# EAGLE board Squirco Power v1.0 (EAGLE 6.5.0)
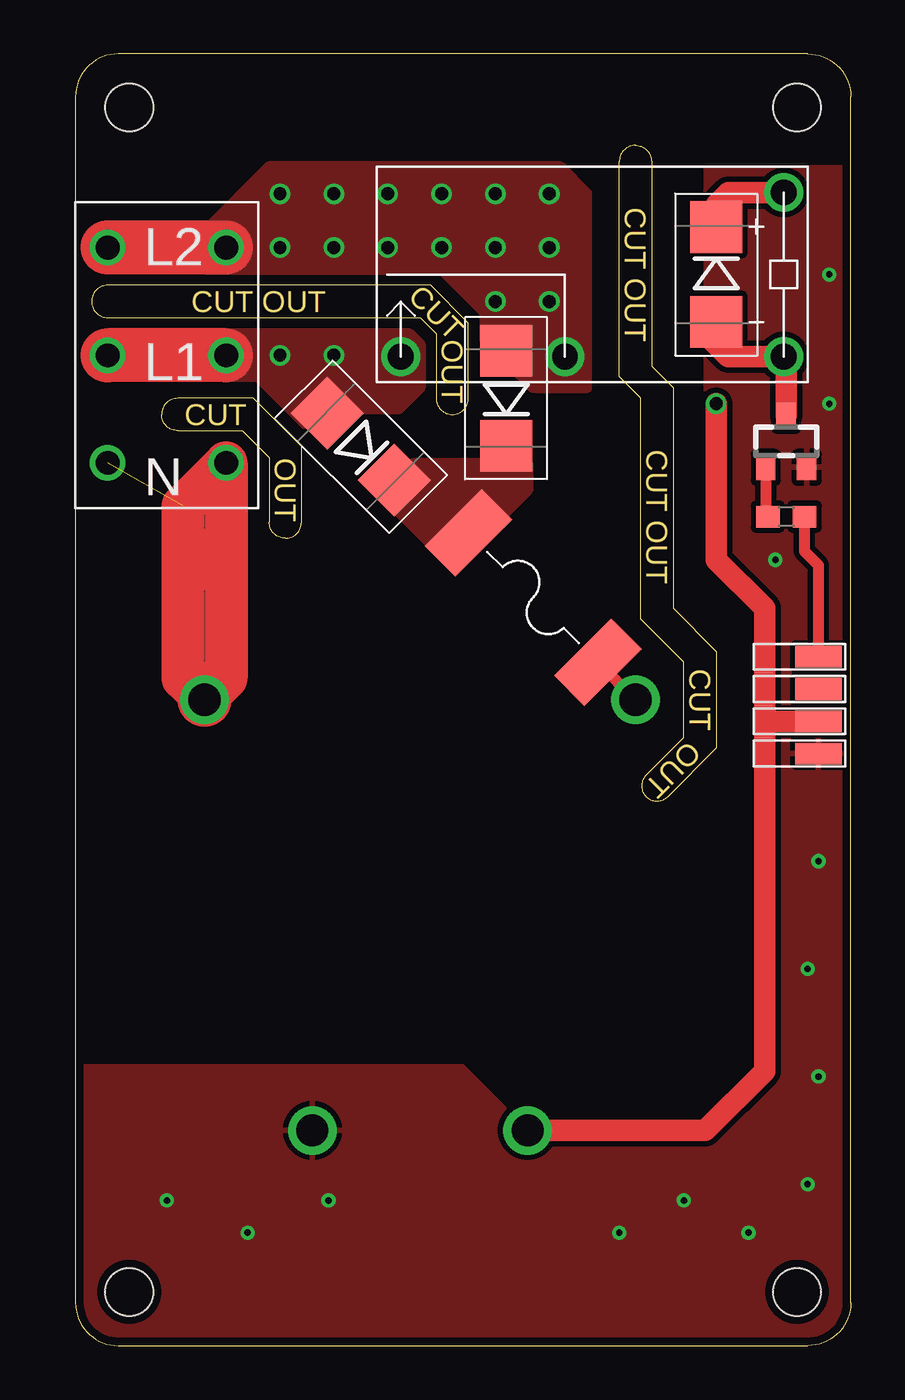
[diagram p0: board, top side]
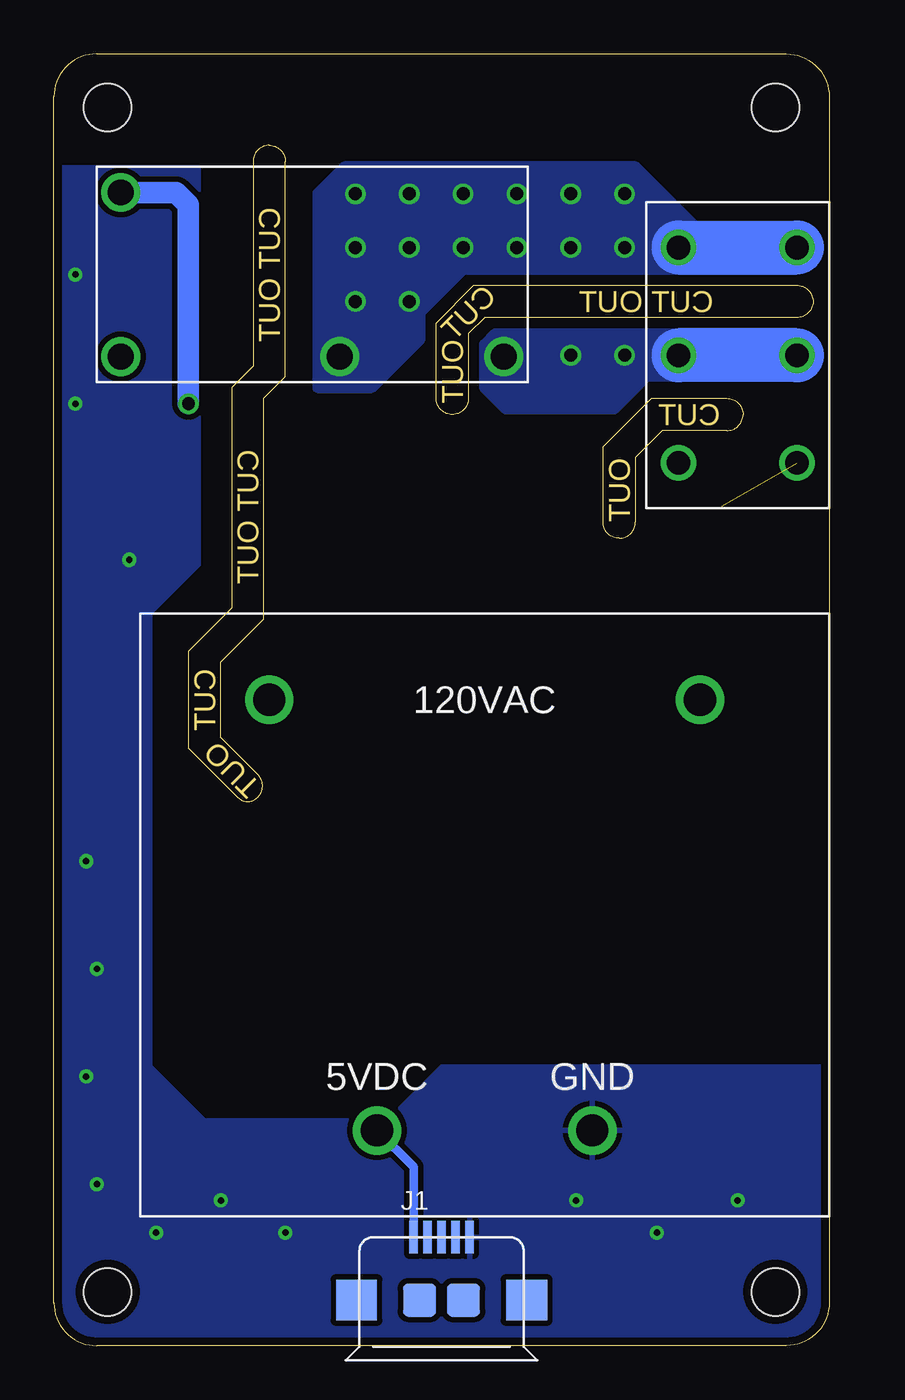
[diagram p1: board, bottom side, seen from below]

Size 36 x 60 mm. Coordinates in mm from the lower left corner, seen from the top.
Outline: 2,0 34,0 arc90 36,2 36,58 arc90 34,60 2,60 arc90 0,58 0,2 arc90 2,0
Outline: 26.75,55 26.75,45.5 27.75,44.5 27.75,34.25 29.75,32.25 29.75,27.75 27.47,25.47 arc-90 26.53,25.47 arc-90 26.53,26.53 28.25,28.25 28.25,31.75 26.25,33.75 26.25,44 25.25,45 25.25,55 arc-90 26,55.75 arc-90 26.75,55
Outline: 4.75,42.5 7.75,42.5 9,41.25 9,38.25 arc90 9.75,37.5 arc90 10.5,38.25 10.5,41.75 8.25,44 4.75,44 arc90 4,43.25 arc90 4.75,42.5
Outline: 16.5,49.25 1.5,49.25 arc90 0.75,48.5 arc90 1.5,47.75 16,47.75 16.75,47 16.75,44 arc90 17.5,43.25 arc90 18.25,44 18.25,47.5 16.5,49.25
Copper layers (1*16): Top 0.0356mm / dielectric 1.5011mm / Bottom 0.0356mm
Design rules "LaenPCBOrder *": minimum track width 6mil, minimum drill 13mil, track to track 6mil, track to pad 6mil, pad to pad 6mil, via to via 6mil, smd to smd 6mil, copper to edge 15mil, drill to drill 6mil, minimum pad ring 7mil, minimum via ring 7mil, stop-mask expansion 3mil, vias tented up to drill 15mil, thermal gap 10mil
Net classes: 1 Tline: width 0.003 mm, drill 0.33 mm; 2 120v Mains 5A: clearance 1.27 mm
Holes 2.2 mm at 2.5,57.5 33.5,57.5 2.5,2.5 33.5,2.5

## Footprints (pad centres in the part's own frame; a part is rotated, then mirrored left to right if it is on the bottom)
SMB-DIODE = smd 2.4 x 2.4: A 2.2,0; C -2.2,0
UMT250 = smd 2 x 3.75: P$1 -4.25,0; P$2 4.25,0
B-SMD-5P = smd 0.38 x 1.52: 1 -1.3,2.54; 2 -0.65,2.54; 3 0,2.54; 4 0.65,2.54; 5 1.3,2.54 | smd 1.524 x 1.524: E1 -1.016,-0.381; E2 1.016,-0.381 | smd 1.9 x 1.9: P1 -3.95,-0.381; P2 3.95,-0.381
LF-SMT5 = drill 1.1: 1 -5,-2.75; 2 -5,2.75; 3 0,-2.75; 4 0,2.75; 5 5,-2.75; 6 5,2.75
SOT23 = smd 0.9 x 1.2: 1 -0.95,-1.2; 2 0.95,-1.2; 3 0,1.2
0603-RES = smd 1.1 x 1: 1 -0.85,0; 2 0.85,0
VTX-214-003-1XX = drill 1.5: 1 10,10; 2 -10,10; 3 -5,-10; 4 5,-10
S04-4MM = smd 2.15 x 1: 1 0,0; 2 0,1.5; 3 0,3; 4 0,4.5
ALQ305 = drill 1.2: C1 -3.81,8.89; C2 3.81,8.89; COM 3.81,-1.27; NO 3.81,-8.89

## Placement (x,y rotation side)
D1  [SMB-DIODE]  29.75,49.75 270 top
D2  [SMB-DIODE]  13.25,41.75 135 top
D3  [SMB-DIODE]  20,44 90 top
F1  UMT250  [UMT250]  21.25,34.75 315 top
J1  MICRO-USB-5P-340015001  [B-SMD-5P]  18,2.5 0 bottom
JP2  LSF-SMT5  [LF-SMT5]  4.25,46 270 top
Q1  BSS138  [SOT23]  33,42 0 top
R11  39  [0603-RES]  33,38.5 180 top
U$1  VTX-214-003-105  [VTX-214-003-1XX]  16,20 0 bottom
U$3  S04-4MM  [S04-4MM]  34.5,32 180 top
U$4  ALQ305  [ALQ305]  24,49.75 270 top

## Library data of the parts
D1-D3 = SparkFun-DiscreteSemi; PROD_ID: DIO-09646
F1 JP2 = L1
J1 = Connector
Q1 = m-pad-2.1
R11 = SparkFun-Resistors
U$1 = SMPS
U$3 = pinhead-half
U$4 = relay

## Nets
5V: D1.C J1.1 U$1.3 U$3.3 U$4.C1
FCLD: U$3.2
GND: J1.5 Q1.2 U$1.4 U$3.4
L1 [120v Mains 5A]: D2.A JP2.3 JP2.4 U$4.NO
L2 [120v Mains 5A]: D3.A JP2.1 JP2.2 U$4.COM
N [120v Mains 5A]: JP2.5 JP2.6 U$1.1
N$1: F1.P$2 U$1.2
N$4: Q1.1 R11.2
N$14 [120v Mains 5A]: D2.C D3.C F1.P$1
N$15: D1.A Q1.3 U$4.C2
RLY: R11.1 U$3.1

## Tracks (layer width: path | path; a pad name or v marks a point on that pad's centre or on a via)
5V  (via drill 0.6)
  Top 1: U$4.C1 30.31,53.56 29.75,53 D1.C | U$1.3 29.25,10 32,12.75 32,29 | 32,29 32,34.25 29.75,36.5 v29.75,43.75 | U$3.3 32,29
  Bottom 0.4: J1.1 19.3,8.3 U$1.3
  Bottom 1: v29.75,43.75 29.75,53 30.31,53.56 U$4.C1
GND  (via drill 0.3)
  other vias: 35,43.75 32.5,36.5 34.5,22.5 34,17.5 34.5,12.5 34,7.5 35,49.75 28.25,6.75 25.25,5.25 11.75,6.75 8,5.25 4.25,6.75 31.25,5.25
  pour Top (isolate 0.254): 36.5,-3.25 36.25,54.75 29.25,54.75 29.25,36.25 31.5,34 31.5,13 29,10.5 20.5,10.5 18,13 -0.5,13 -0.5,-3.25
  pour Bottom (isolate 0.254): -1.25,13 -1.25,-4 37.25,-4 37.25,54.75 29.25,54.75 29.25,36.25 31.5,34 31.5,13 29,10.5 20.5,10.5 18,13
L1  (via drill 0.6)
  Top 2.5: JP2.4 JP2.3
  Bottom 2.5: JP2.3 JP2.4
  other vias: 9.5,46 12,46
  pour Top (no thermals): 7,47 15.5,47 16,46.5 16,44.5 15,43.5 11.5,43.5 10.75,42.75 8.5,45 7,45
  pour Bottom (no thermals): 15.5,47 7,47 7,45 8.5,45 10,43.5 15,43.5 16,44.5 16,46.5
L2  (via drill 0.6)
  Top 2.5: JP2.2 JP2.1
  Bottom 2.5: JP2.2 JP2.1
  other vias: 9.5,51 12,51 14.5,51 17,51 12,53.5 14.5,53.5 17,53.5 19.5,53.5 22,53.5 22,51 22,48.5 19.5,48.5 9.5,53.5 19.5,51
  pour Top (no thermals): 6,50 17,50 19,48 19,46.75 21.25,44.5 23.75,44.5 23.75,53.5 22.5,54.75 9,54.75 6,51.75
  pour Bottom (no thermals): 6,50 6,51.75 9,54.75 22.5,54.75 23.75,53.5 23.75,44.5 21.25,44.5 19,46.75 19,48 17,50
N  (1 unrouted)
  Top 2: 7,35.5 JP2.6 5,39 5,37.5 | 7,35.5 7,31 U$1.1 5,31 5,37.5 | 5,37.5 7,35.5
  Top 2.5: U$1.1 6,30.5
N$1
  Top 0.5: F1.P$2 U$1.2
N$4
  Top 0.5: Q1.1 32.05,38.6 R11.2
N$14
  pour Top (no thermals): 21,41 21,39.75 17.5,36.25 14.25,39.5 15.75,41
N$15
  Top 1: Q1.3 33,45.8 U$4.C2 30.31,45.94 29.5,46.75 29.5,47.3 D1.A
RLY
  Top 0.5: R11.1 33.85,36.9 34.5,36.25 U$3.1

## Text on the board
Dimension: CUT OUT | CUT OUT | CUT | OUT | CUT | OUT | CUT OUT | CUT | OUT
tPlace: L2 / L1 / N
tValues: Released under the CC BY-SA 4.0 License / https://creativecommons.org/licenses/by-sa/4.0/
tStop: Copyright 2015 Squirco